# Altium PCB DashDataDisplayPCB.PcbDoc (part 1 of 4)
Units mm, origin at the board's own origin, x right, y up, seen from the top; angles counter-clockwise.
Board outline 152.4 x 101.6 mm, 2 copper layers (Top Layer, Bottom Layer); 143 components, 97 nets, 509 pads, 233 vias.
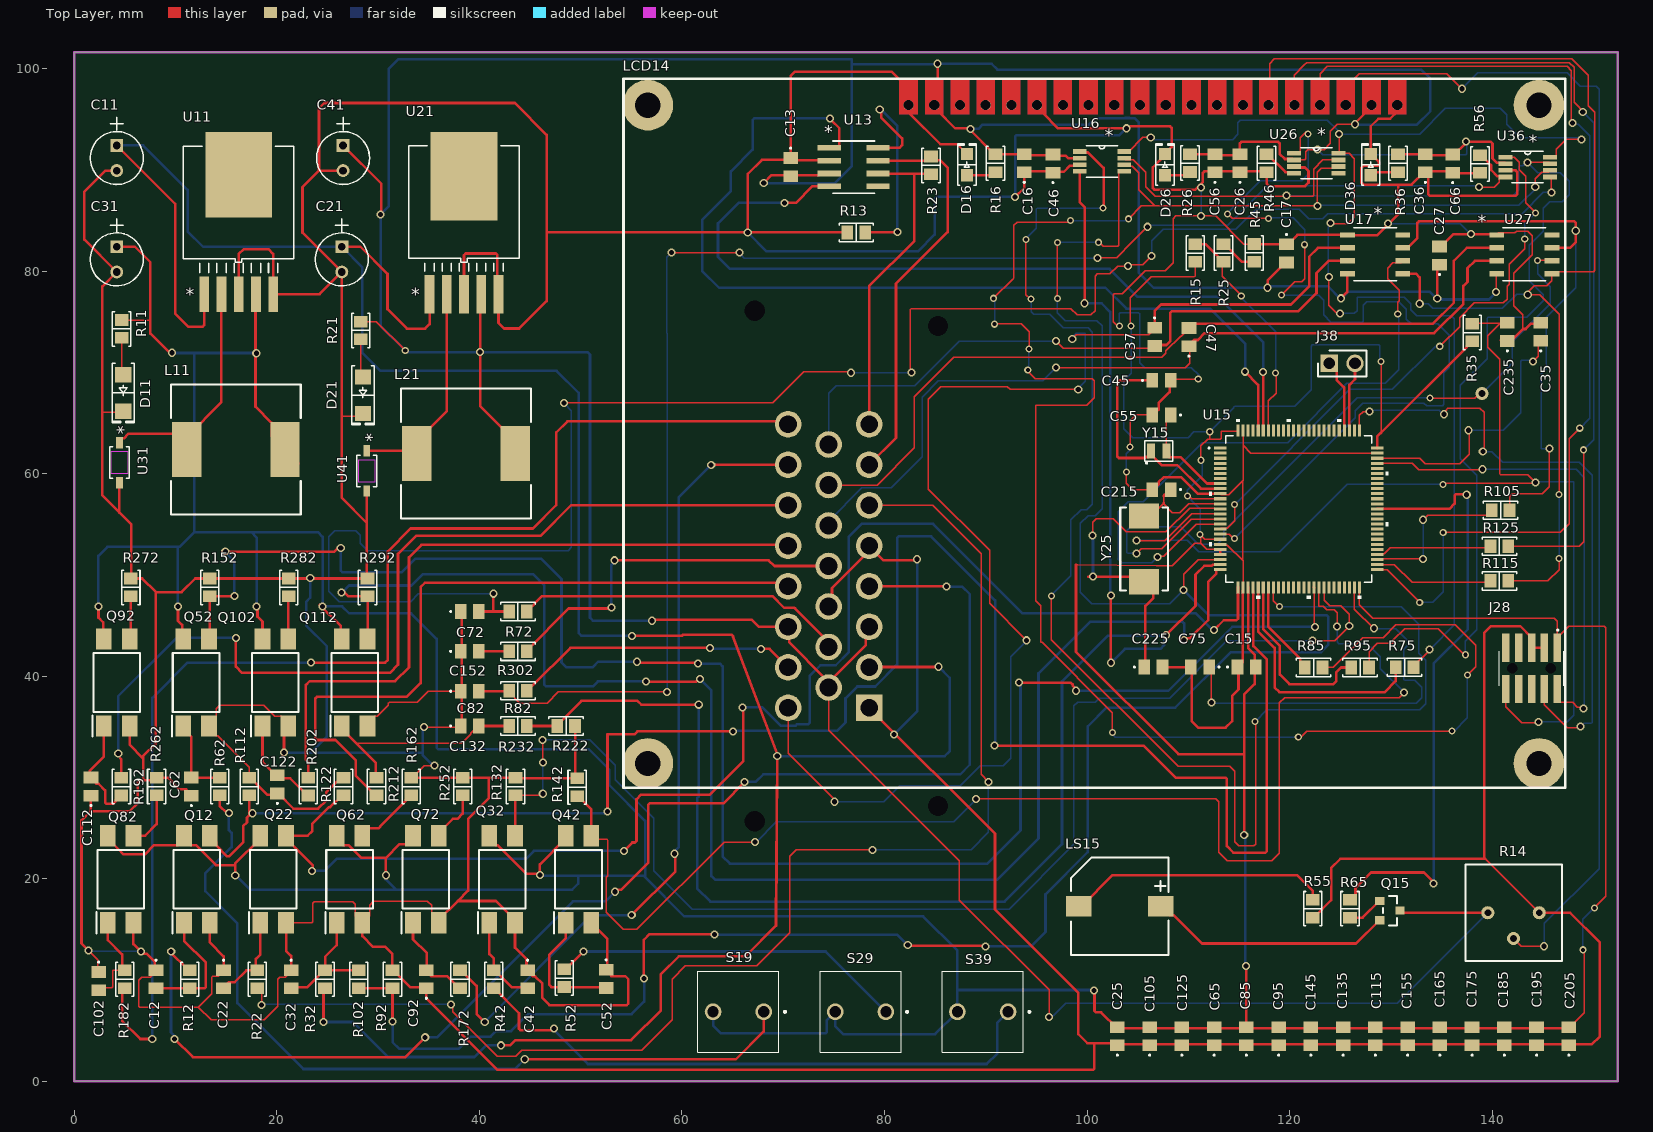
[diagram p0: Top Layer view]
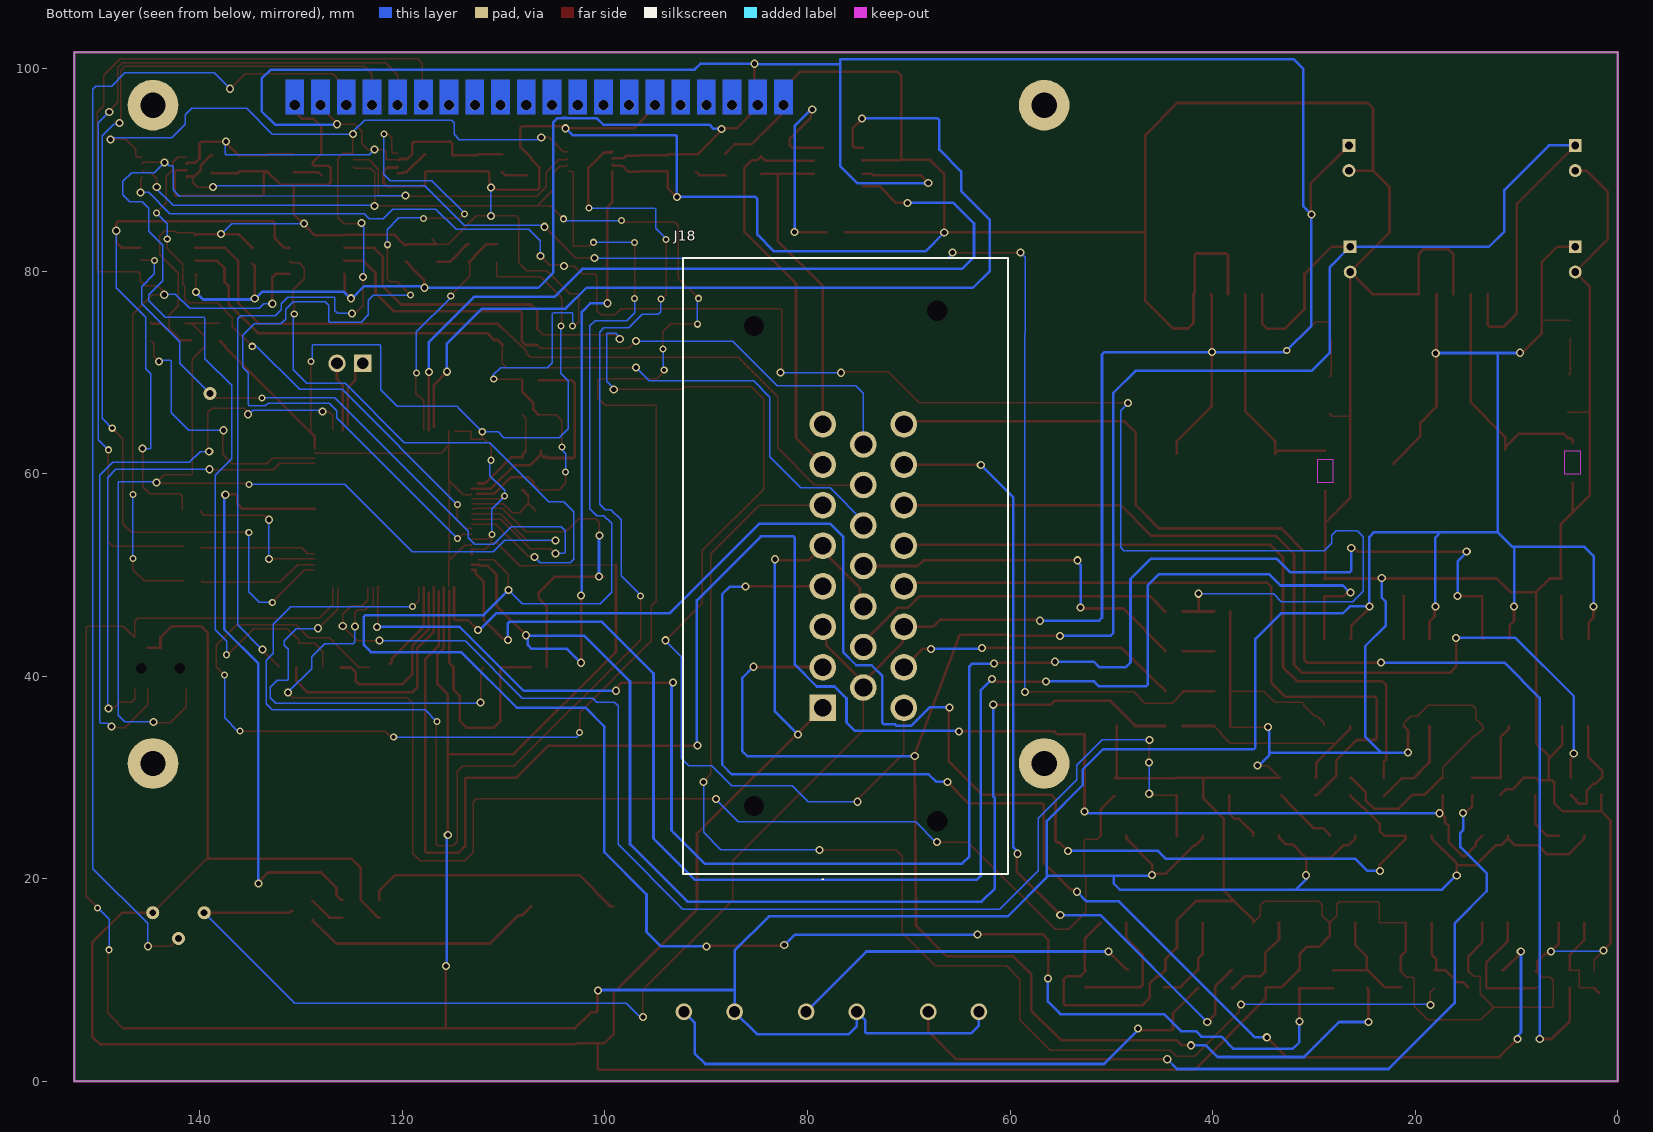
[diagram p1: Bottom Layer view, seen from below]
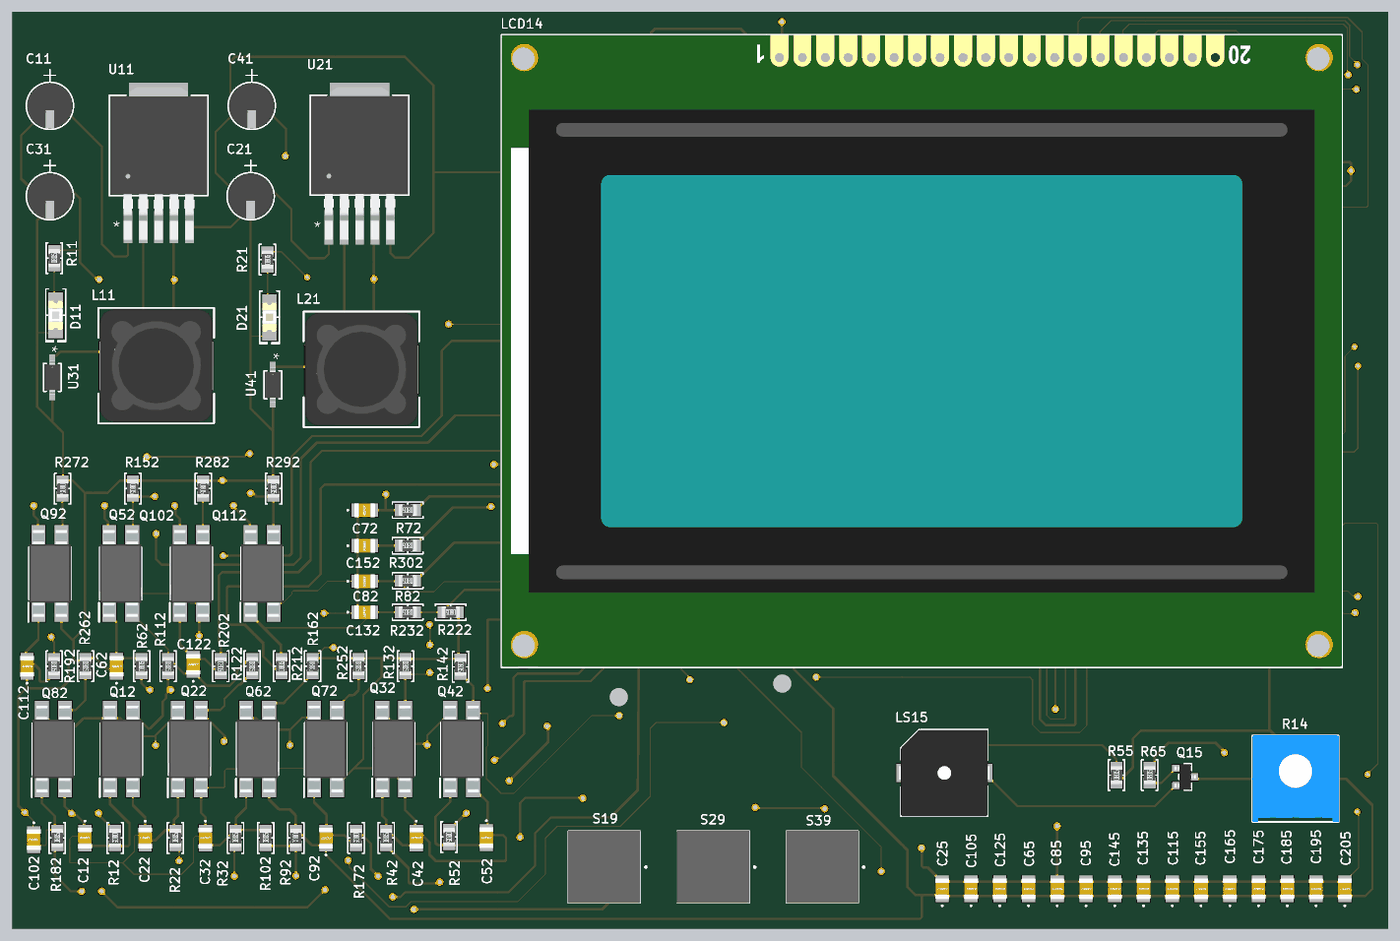
[diagram p4: 3D render of the assembled board from above, using the file's embedded part models]

## Layer stack, top to bottom
Top Solder: solder mask 0.0102, Solder Resist, Dk 3.5
Top Layer: signal copper 0.0356
Dielectric 1: dielectric 0.32, FR-4, Dk 4.8
Bottom Layer: signal copper 0.0356
Bottom Solder: solder mask 0.0102, Solder Resist, Dk 3.5

## Board outline
0,0 152.4,0 152.4,101.6 0,101.6

## Design rules (kind name [scope] priority, off if disabled: settings)
AssemblyTestPointUsage [All] p1: allowmultiple=TRUE
AssemblyTestpoint [All] p1: testpointundercomponent=TRUE minsize=0.3 maxsize=2.54 preferedsize=0.7 minholesize=0 maxholesize=1.016 preferedholesize=0.5 testpointgrid=0.025 usegrid=TRUE gridtolerance=0 allowsidetop=TRUE allowsidebottom=TRUE
BoardOutlineClearance [All] p1: gap=0.4 ignorepadtopadclearanceinfootprint=FALSE
Clearance [All] p1: gap=0.254 ignorepadtopadclearanceinfootprint=TRUE except(0.127: Arc-Arc Arc-Track Track-Track SMDPad-SMDPad SMDPad-THPad THPad-THPad; 0.2: Arc-SMDPad Track-SMDPad; 0.33: Arc-THPad Track-THPad; 0.5: Arc-Hole Track-Hole SMDPad-Hole THPad-Hole Via-Hole Fill-Hole Poly-Hole Region-Hole Text-Hole)
FabricationTestPointUsage [All] p1: valid=0 allowmultiple=TRUE
FabricationTestpoint [All] p1: side=3 testpointundercomponent=TRUE minsize=0.3 maxsize=2.54 preferedsize=0.7 minholesize=0 maxholesize=1.016 preferedholesize=0.5 testpointgrid=0.025 allowsidetop=TRUE allowsidebottom=TRUE usegrid=TRUE gridtolerance=0
Height [All] p1: minheight=0 maxheight=300 prefheight=300
HoleSize [All] p1: absolutevalues=TRUE maxlimit=6.3 minlimit=0.15 maxpercent=80.000 minpercent=20.000
HoleToHoleClearance [All] p1: gap=0.5 allowstackedmicrovias=TRUE
MinimumAnnularRing [All] p1: minimumring=0.14
MinimumSolderMaskSliver [All] p1: minsoldermaskwidth=0.1
PolygonConnect [All] p1: connectstyle=Relief reliefconductorwidth=0.254 reliefentries=4 polygonreliefangle="90 Angle" airgapwidth=0.254
RoutingVias [All] p1: holewidth=0.5 width=0.8 viastyle="Through Hole" minholewidth=0.3 minwidth=0.5 maxholewidth=1.5 maxwidth=1.7
SilkToSilkClearance [All] p1: silktosilkclearance=0.15
SilkToSolderMaskClearance [IsPad] p1: minsilkscreentomaskgap=0.15 clearancetoexposedcopper=TRUE
SolderMaskExpansion [All] p1: expansion=0.1 istentingtop=FALSE
Width [All] p1: maxlimit=0.254 minlimit=0.127 preferedwidth=0.127 minimp=50.000000 maximp=50.000000 favimp=50.000000
20 further rules are at their usual default settings.

## Classes and differential pairs
component class ThermoCoupleCircuit: C17 C27 C37 C47 U17 U27
component class SensorCircuit: C12 C22 C32 C42 C52 C62 C72 C82 C92 C102 C112 C122 C132 C152 Q12 Q22 Q32 Q42 Q52 Q62 Q72 Q82 Q92 Q102 Q112 R12 R22 R32 R42 R52 R62 R72 R82 R92 R102 R112 R122 R132 R142 R152 R162 R172 R182 R192 R202 R212 R222 R232 R252 R262 R272 R282 R292 R302
component class PowerSupply: C11 C21 C31 C41 D11 D21 L11 L21 R11 R21 U11 U21 U31 U41
component class MCUCircuit: C15 C25 C35 C45 C55 C65 C75 C85 C95 C105 C115 C125 C135 C145 C155 C165 C175 C185 C195 C205 C215 C225 C235 LS15 Q15 R15 R25 R35 R45 R55 R65 R75 R85 R95 R105 R115 R125 U15 Y15 Y25
component class LCDCircuit: LCD14 R14
component class Connector: J18 J28 J38
component class CanTrcvCircuit: C13 R13 R23 U13
component class ButtonCircuit: S19 S29 S39
component class ADCCircuit: C16 C26 C36 C46 C56 C66 D16 D26 D36 R16 R26 R36 R46 R56 U16 U26 U36

## Components (designator, comment, footprint, x,y, rotation, side; value= is the part's Value field where it differs from the comment)
C11 "EEUFC0J101" "CAP_5 X 11_PAN" 4.191,92.405 r270 top value=100uF
C12 "0.33µF" C0805 8.069,10.071 r270 top
C13 "0.1 µF" C0805 70.739,90.262 r270 top
C15 "1µF" C0805 115.753,40.894 r0 top
C16 "1 µF" C0805 93.801,90.643 r90 top
C17 "0.1 µF" C0805 119.691,81.739 r270 top
C21 "EEUFC0J101" "CAP_5 X 11_PAN" 26.416,82.398 r270 top value=100uF
C22 "0.33µF" C0805 14.74,10.071 r270 top
C25 "0.1µF" C0805 102.997,4.445 r90 top
C26 "1 µF" C0805 115.101,90.643 r90 top
C27 "0.1 µF" C0805 134.804,81.523 r90 top
C31 "EEUFC0J101" "CAP_5 X 11_PAN" 4.191,82.398 r270 top value=330uF
C32 "0.33µF" C0805 21.412,10.071 r270 top
C35 "2.2 µF" C0805 144.8,74 r90 top
C36 "1 µF" C0805 133.41,90.643 r90 top
C37 "10000 pF" C0805 106.68,73.495 r270 top
C41 "EEUFC0J101" "CAP_5 X 11_PAN" 26.543,92.405 r270 top value=330uF
C42 "0.33µF" C0805 44.763,10.071 r270 top
C45 "12 pF" C0805 107.353,69.215 r0 top
C46 "0.1 µF" C0805 96.632,90.605 r90 top
C47 "10000 pF" C0805 110.06,73.47 r90 top
C52 "0.33µF" C0805 52.52,10.11 r270 top
C55 "12 pF" C0805 107.353,65.786 r180 top
C56 "0.1 µF" C0805 112.633,90.643 r90 top
C62 "0.33µF" C0805 11.557,29.097 r90 top
C65 "1µF" C0805 112.549,4.445 r90 top
C66 "0.1 µF" C0805 136.107,90.605 r90 top
C72 "0.33µF" C0805 39.045,46.382 r0 top
C75 "2.2 µF" C0805 111.153,40.894 r180 top
C82 "0.33µF" C0805 39.045,38.508 r0 top
C85 "0.1µF" C0805 115.733,4.445 r90 top
C92 "0.33µF" C0805 34.756,10.071 r90 top
C95 "1µF" C0805 118.917,4.445 r90 top
C102 "0.33µF" C0805 2.41,9.88 r270 top
C105 "1µF" C0805 106.181,4.445 r90 top
C112 "0.33µF" C0805 1.651,29.097 r90 top
C115 "0.1µF" C0805 128.47,4.445 r90 top
C122 "0.33µF" C0805 20.05,29.31 r90 top
C125 "0.1µF" C0805 109.365,4.445 r90 top
C132 "0.33µF" C0805 39.045,35.079 r0 top
C135 "1µF" C0805 125.285,4.445 r90 top
C145 "0.1µF" C0805 122.101,4.445 r90 top
C152 "0.33µF" C0805 39.045,42.445 r0 top
C155 "1µF" C0805 131.654,4.445 r90 top
C165 "0.1µF" C0805 134.838,4.445 r90 top
C175 "1µF" C0805 138.022,4.445 r90 top
C185 "0.1µF" C0805 141.206,4.445 r90 top
C195 "1µF" C0805 144.39,4.445 r90 top
C205 "0.1µF" C0805 147.574,4.445 r90 top
C215 "12 pF" C0805 107.353,58.42 r180 top
C225 "12 pF" C0805 106.553,40.894 r0 top
C235 "0.1µF" C0805 141.503,73.995 r90 top
D11 "Green" "LED 1206_3216 GREEN" 4.83,67.96 r270 top
D16 "Green" "LED 0805_2012 GREEN" 88.138,90.516 r90 top
D21 "Red" "LED 1206_3216 RED" 28.5,67.74 r270 top
D26 "Green" "LED 0805_2012 GREEN" 107.696,90.516 r90 top
D36 "Green" "LED 0805_2012 GREEN" 128.016,90.516 r90 top
J18 "1-776200-5" 17762005 78.483,36.873 r90 bottom locked
J28 "FTSH-105-01-L-DV-A" FTSH-105-XX-YYY-DV-A 143.891,40.767 r180 top
J38 "87527-2" HDRV2W66P0X254_1X2_467X244X1044P 123.92,70.89 r180 top
L11 "330 µH" "BOURNS SRR1280" 15.96,62.38 r0 top
L21 "330 µH" "BOURNS SRR1280" 38.68,61.98 r0 top
LCD14 "glcd128*64" GLCD128*64 99.859,63.674 r180 top locked
LS15 "SMI-1027-TW-5V-R" "PUI Audio SMI-1027-TW-5V-R" 103.237,17.272 r270 top
Q12 "PC817XNNIP1B" SOP254P960X420-4N 12.107,19.939 r90 top
Q15 "MMBT4124LT1G" "ON SEMI SOT-23-3" 129.903,16.842 r0 top
Q22 "PC817XNNIP1B" SOP254P960X420-4N 19.643,19.939 r90 top
Q32 "PC817XNNIP1B" SOP254P960X420-4N 42.249,19.939 r90 top
Q42 "PC817XNNIP1B" SOP254P960X420-4N 49.784,19.939 r90 top
Q52 "PC817XNNIP1B" SOP254P960X420-4N 12.023,39.37 r90 top
Q62 "PC817XNNIP1B" SOP254P960X420-4N 27.178,19.939 r90 top
Q72 "PC817XNNIP1B" SOP254P960X420-4N 34.713,19.939 r90 top
Q82 "PC817XNNIP1B" SOP254P960X420-4N 4.572,19.939 r90 top
Q92 "PC817XNNIP1B" SOP254P960X420-4N 4.191,39.37 r90 top
Q102 "PC817XNNIP1B" SOP254P960X420-4N 19.854,39.37 r90 top
Q112 "PC817XNNIP1B" SOP254P960X420-4N 27.686,39.37 r90 top
R11 "470 Ohms" "RES 0805_2012" 4.67,74.285 r90 top
R12 "19.1 kOhms" "RES 0805_2012" 11.405,10.071 r270 top
R13 "10 kOhms" "RES 0805_2012" 77.21,83.81 r180 top
R14 "10 kOhms" "BOURNS TRIMPOT 3386P-1" 142.113,16.637 r0 top locked
R15 "10 kOhms" "RES 0805_2012" 110.674,81.777 r270 top
R16 "470 Ohms" "RES 0805_2012" 90.969,90.643 r90 top
R21 "470 Ohms" "RES 0805_2012" 28.28,74.135 r90 top
R22 "19.1 kOhms" "RES 0805_2012" 18.076,10.071 r90 top
R23 "120 Ohms" "RES 0805_2012" 84.59,90.435 r90 top
R25 "510 Ohms" "RES 0805_2012" 113.468,81.777 r90 top
R26 "470 Ohms" "RES 0805_2012" 110.164,90.657 r90 top
R32 "48.7 kOhms" "RES 0805_2012" 24.748,10.071 r90 top
R35 "10 kOhms" "RES 0805_2012" 138.049,73.928 r270 top
R36 "470 Ohms" "RES 0805_2012" 130.713,90.643 r90 top
R42 "19.1 kOhms" "RES 0805_2012" 41.427,10.071 r90 top
R45 "0 Ohms" "RES 0805_2012" 116.516,81.791 r270 top
R46 "10 kOhms" "RES 0805_2012" 117.729,90.643 r90 top
R52 "19.1 kOhms" "RES 0805_2012" 48.387,10.174 r270 top
R55 "100 Ohms" "RES 0805_2012" 122.29,17.035 r90 top
R56 "10 kOhms" "RES 0805_2012" 138.804,90.576 r90 top
R62 "19.1 kOhms" "RES 0805_2012" 14.351,29.097 r90 top
R65 "100 Ohms" "RES 0805_2012" 125.96,17.035 r90 top
R72 "750 Ohms" "RES 0805_2012" 43.807,46.382 r180 top
R75 "0 Ohms" "RES 0805_2012" 131.355,40.89 r180 top
R82 "750 Ohms" "RES 0805_2012" 43.807,38.558 r180 top
R85 "0 Ohms" "RES 0805_2012" 122.374,40.854 r180 top
R92 "1.2 kOhms" "RES 0805_2012" 31.42,10.071 r270 top
R95 "0 Ohms" "RES 0805_2012" 126.974,40.854 r180 top
R102 "10 kOhms" "RES 0805_2012" 28.084,10.071 r90 top
R105 "0 Ohms" "RES 0805_2012" 140.843,56.388 r180 top
R112 "10 kOhms" "RES 0805_2012" 17.272,29.097 r270 top
R115 "0 Ohms" "RES 0805_2012" 140.716,49.403 r180 top
R122 "10 kOhms" "RES 0805_2012" 26.586,29.097 r270 top
R125 "0 Ohms" "RES 0805_2012" 140.716,52.832 r180 top
R132 "10 kOhms" "RES 0805_2012" 43.561,29.097 r270 top
R142 "10 kOhms" "RES 0805_2012" 49.65,29.03 r270 top
R152 "10 kOhms" "RES 0805_2012" 13.377,48.768 r270 top
R162 "10 kOhms" "RES 0805_2012" 33.274,29.097 r270 top
R172 "19.1 kOhms" "RES 0805_2012" 38.092,10.071 r270 top
R182 "19.1 kOhms" "RES 0805_2012" 4.993,10.071 r90 top
R192 "19.1 kOhms" "RES 0805_2012" 4.65,29.09 r270 top
R202 "19.1 kOhms" "RES 0805_2012" 23.11,29.085 r270 top
R212 "48.7 kOhms" "RES 0805_2012" 29.845,29.097 r90 top
R222 "1.2 kOhms" "RES 0805_2012" 48.57,35.079 r180 top
R232 "10 kOhms" "RES 0805_2012" 43.807,35.079 r180 top
R252 "10 kOhms" "RES 0805_2012" 38.354,29.097 r270 top
R262 "10 kOhms" "RES 0805_2012" 8.128,29.097 r270 top
R272 "10 kOhms" "RES 0805_2012" 5.588,48.768 r270 top
R282 "10 kOhms" "RES 0805_2012" 21.167,48.768 r270 top
R292 "10 kOhms" "RES 0805_2012" 28.956,48.768 r270 top
R302 "750 Ohms" "RES 0805_2012" 43.807,42.445 r180 top
S19 "B3WN-6002" B3WN6002 68.072,6.858 r0 top
S29 "B3WN-6002" B3WN6002 80.137,6.858 r0 top
S39 "B3WN-6002" B3WN6002 92.202,6.858 r0 top
U11 "LM2575-3.3BU" TO-263-5_MCL 16.231,86.779 r0 top
U13 "MCP2551T-ISN" SOIC8-N_MC_MCH-M 76.962,90.262 r0 top
U15 "STM32F407VGT6" LQFP100-14x14mm 120.904,56.515 r0 top locked
U16 "ADC122S101CIMMNOPB" MUA08A 101.473,90.826 r0 top
U17 "MAX31855KASA+T" 21-0041B_8_MXM 128.454,81.65 r0 top
U21 "LM2575-5.0BU" TO-263-5_MCL-M 38.481,86.804 r0 top
U26 "ADC122S101CIMMNOPB" MUA08A 122.645,90.643 r0 top
U27 "MAX31855KASA+T" 21-0041B_8_MXM 143.186,81.65 r0 top locked
U31 "1N5819HW-7-F" 1N5819HW-7-F_DIO 4.46,61.08 r270 top
U36 "ADC122S101CIMMNOPB" MUA08A 143.51,90.262 r0 top
U41 "1N5819HW-7-F" 1N5819HW-7-F_DIO 28.877,60.264 r270 top
Y15 "32.768 kHz" "MICRO CRYSTAL CM8V H0.6mm" 107.078,62.23 r0 top
Y25 "8MHz" "NDK NX8045GB" 105.63,52.57 r270 top

## Footprints (in the part's own frame and the unit in brackets; to place one, negate y for a bottom-side part, rotate by r counter-clockwise, add the part's x,y. Pads: shape width x height; smd on the part's side, far side on the other; paste and mask are expansions set on the pad)
1N5819HW-7-F_DIO [mil]
  rect 44x26 smd paste+0 mask+0: 1(-77.79,0) 2(77.79,0)
  Keep-Out Layer region: -43.79,-31.5 -43.79,31.5 43.79,31.5 43.79,-31.5
  silkscreen extent -61,-39 61,39, body extent -76,-34 76,34, height 53
21-0041B_8_MXM [mil]
  rect 57.5x21 smd paste+0 mask+0: 1(-107.25,75) 2(-107.25,25) 3(-107.25,-25) 4(-107.25,-75) 5(107.25,-75) 6(107.25,-25) 7(107.25,25) 8(107.25,75)
  silkscreen extent -84,-104 84,104, body extent -122,-99 122,99, height 69
17762005 [mm]
  rect 2.625x2.625 hole 1.75: 1(0,0)
  round 2.625 hole 1.75: 2(4,0) 3(8,0) 4(12,0) 5(16,0) 6(20,0) 7(24,0) 8(28,0) 9(2,-4) 10(6,-4) 11(10,-4) 12(14,-4) 13(18,-4) 14(22,-4) 15(26,-4) 16(0,-8) 17(4,-8) 18(8,-8) 19(12,-8) 20(16,-8) 21(20,-8) 22(24,-8) 23(28,-8)
  round 1 hole 2 unplated: MH1(-9.7,6.8) MH2(37.7,6.8) MH3(-11.2,-11.3) MH4(39.2,-11.3)
  silkscreen extent -17,-18.3 44.4,13.8, body extent -16.4,-19.92 44.4,12.18, height 35
B3WN6002 [mm]
  round 1.65 hole 1.1: 1(0,0) 2(-5,0)
  silkscreen extent -6.5,-4 2.2,4, body extent -6.5,-4 1.5,4, height 13.3
"BOURNS SRR1280" [mm] "Precision Wire Wound Inductor, 2-Leads, Body 12.50x12.50mm, IPC Medium Density"
  rect 2.9x5.4 smd: 1(-4.85,0) 2(4.85,0)
  silkscreen extent -6.4,-6.4 6.4,6.4, body extent -6.25,-6.25 6.25,6.25, height 7.9
"BOURNS TRIMPOT 3386P-1" [mm] "3386 - 3/8 ? Square Trimpot� Trimming Potentiometer"
  round 1.29 hole 0.69: 1(-2.54,0) 2(0,-2.54) 3(2.54,0)
  silkscreen extent -4.76,-4.76 4.76,4.76, body extent -4.79,-4.79 4.79,4.79, height 4.95
C0805 [mm]
  rect 1.15x1.45 smd: 1(-0.9,0) 2(0.9,0)
  silkscreen extent -1.93,-0.05 -1.83,0.05, body extent -1.15,-0.78 1.15,0.77, height 0.98
"CAP_5 X 11_PAN" [mil]
  rect 50x50 / inner round 60 / far side rect 50x50 hole 30 paste-99999 mask+0: 1(0,0)
  round 50 / inner round 60 / far side round 50 hole 30 paste-99999 mask+0: 2(98,0)
  silkscreen extent -109,-103 152,103, body extent -49,-98 148,98, height 434
FTSH-105-XX-YYY-DV-A [mm]
  rect 0.74x2.79 smd: 1(-2.54,-2.035) 2(-2.54,2.035) 3(-1.27,-2.035) 4(-1.27,2.035) 5(0,-2.035) 6(0,2.035) 7(1.27,-2.035) 8(1.27,2.035) 9(2.54,-2.035) 10(2.54,2.035)
  round 0.51 hole 1.02 unplated: 11(-1.905,0) 12(1.905,0)
  silkscreen extent -3.18,-3.83 3.18,1.72
GLCD128*64 [mm]
  round 1 hole 1: 1(-30.771,-32.706) 2(-28.231,-32.706) 3(-25.691,-32.706) 4(-23.151,-32.706) 5(-20.611,-32.706) 6(-18.071,-32.706) 7(-15.531,-32.706) 8(-12.991,-32.706) 9(-10.451,-32.706) 10(-7.911,-32.706) 11(-5.371,-32.706) 12(-2.831,-32.706) 13(-0.291,-32.706) 14(2.249,-32.706) 15(4.789,-32.706) 16(7.329,-32.706) 17(9.869,-32.706) 18(12.409,-32.706) 19(14.949,-32.706) 20(17.489,-32.706)
  round 5 hole 2.5: 21(-44.771,-32.706) 22(43.229,-32.706) 23(-44.771,32.294) 24(43.229,32.294)
  Top Layer region: -31.671,-31.806 -31.671,-31.806 -29.871,-31.806 -29.871,-35.206 -31.671,-35.206
  Top Layer region: 16.589,-31.806 16.589,-31.806 18.389,-31.806 18.389,-35.206 16.589,-35.206
  Top Layer region: 14.049,-31.806 14.049,-31.806 15.849,-31.806 15.849,-35.206 14.049,-35.206
  Top Layer region: 11.509,-31.806 11.509,-31.806 13.309,-31.806 13.309,-35.206 11.509,-35.206
  Top Layer region: 8.969,-31.806 8.969,-31.806 10.769,-31.806 10.769,-35.206 8.969,-35.206
  Top Layer region: 6.429,-31.806 6.429,-31.806 8.229,-31.806 8.229,-35.206 6.429,-35.206
  Top Layer region: 3.889,-31.806 3.889,-31.806 5.689,-31.806 5.689,-35.206 3.889,-35.206
  Top Layer region: 1.349,-31.806 1.349,-31.806 3.149,-31.806 3.149,-35.206 1.349,-35.206
  Top Layer region: -1.191,-31.806 -1.191,-31.806 0.609,-31.806 0.609,-35.206 -1.191,-35.206
  Top Layer region: -3.731,-31.806 -3.731,-31.806 -1.931,-31.806 -1.931,-35.206 -3.731,-35.206
  Top Layer region: -6.271,-31.806 -6.271,-31.806 -4.471,-31.806 -4.471,-35.206 -6.271,-35.206
  Top Layer region: -8.811,-31.806 -8.811,-31.806 -7.011,-31.806 -7.011,-35.206 -8.811,-35.206
  Top Layer region: -11.351,-31.806 -11.351,-31.806 -9.551,-31.806 -9.551,-35.206 -11.351,-35.206
  Top Layer region: -13.891,-31.806 -13.891,-31.806 -12.091,-31.806 -12.091,-35.206 -13.891,-35.206
  Top Layer region: -16.431,-31.806 -16.431,-31.806 -14.631,-31.806 -14.631,-35.206 -16.431,-35.206
  Top Layer region: -18.971,-31.806 -18.971,-31.806 -17.171,-31.806 -17.171,-35.206 -18.971,-35.206
  Top Layer region: -21.511,-31.806 -21.511,-31.806 -19.711,-31.806 -19.711,-35.206 -21.511,-35.206
  Top Layer region: -24.051,-31.806 -24.051,-31.806 -22.251,-31.806 -22.251,-35.206 -24.051,-35.206
  Top Layer region: -26.591,-31.806 -26.591,-31.806 -24.791,-31.806 -24.791,-35.206 -26.591,-35.206
  Top Layer region: -29.131,-31.806 -29.131,-31.806 -27.331,-31.806 -27.331,-35.206 -29.131,-35.206
  Bottom Layer region: 16.589,-31.806 16.589,-31.806 18.389,-31.806 18.389,-35.206 16.589,-35.206
  Bottom Layer region: 14.049,-31.806 14.049,-31.806 15.849,-31.806 15.849,-35.206 14.049,-35.206
  Bottom Layer region: 11.509,-31.806 11.509,-31.806 13.309,-31.806 13.309,-35.206 11.509,-35.206
  Bottom Layer region: 8.969,-31.806 8.969,-31.806 10.769,-31.806 10.769,-35.206 8.969,-35.206
  Bottom Layer region: 6.429,-31.806 6.429,-31.806 8.229,-31.806 8.229,-35.206 6.429,-35.206
  Bottom Layer region: 3.889,-31.806 3.889,-31.806 5.689,-31.806 5.689,-35.206 3.889,-35.206
  Bottom Layer region: 1.349,-31.806 1.349,-31.806 3.149,-31.806 3.149,-35.206 1.349,-35.206
  Bottom Layer region: -1.191,-31.806 -1.191,-31.806 0.609,-31.806 0.609,-35.206 -1.191,-35.206
  Bottom Layer region: -3.731,-31.806 -3.731,-31.806 -1.931,-31.806 -1.931,-35.206 -3.731,-35.206
  Bottom Layer region: -6.271,-31.806 -6.271,-31.806 -4.471,-31.806 -4.471,-35.206 -6.271,-35.206
  Bottom Layer region: -8.811,-31.806 -8.811,-31.806 -7.011,-31.806 -7.011,-35.206 -8.811,-35.206
  Bottom Layer region: -11.351,-31.806 -11.351,-31.806 -9.551,-31.806 -9.551,-35.206 -11.351,-35.206
  Bottom Layer region: -13.891,-31.806 -13.891,-31.806 -12.091,-31.806 -12.091,-35.206 -13.891,-35.206
  Bottom Layer region: -16.431,-31.806 -16.431,-31.806 -14.631,-31.806 -14.631,-35.206 -16.431,-35.206
  Bottom Layer region: -18.971,-31.806 -18.971,-31.806 -17.171,-31.806 -17.171,-35.206 -18.971,-35.206
  Bottom Layer region: -21.511,-31.806 -21.511,-31.806 -19.711,-31.806 -19.711,-35.206 -21.511,-35.206
  Bottom Layer region: -24.051,-31.806 -24.051,-31.806 -22.251,-31.806 -22.251,-35.206 -24.051,-35.206
  Bottom Layer region: -26.591,-31.806 -26.591,-31.806 -24.791,-31.806 -24.791,-35.206 -26.591,-35.206
  Bottom Layer region: -29.131,-31.806 -29.131,-31.806 -27.331,-31.806 -27.331,-35.206 -29.131,-35.206
  Bottom Layer region: -31.671,-31.806 -31.671,-31.806 -29.871,-31.806 -29.871,-35.206 -31.671,-35.206
  silkscreen extent -47.37,-35.31 45.63,34.69, body extent -47.37,-35.33 45.63,34.67, height 29.6
HDRV2W66P0X254_1X2_467X244X1044P [mm]
  rect 1.725x1.725 hole 1.15: 1(0,0)
  round 1.725 hole 1.15: 2(-2.54,0)
  silkscreen extent -3.67,-1.28 1.13,1.28, body extent -3.61,-1.17 1.07,1.17, height 10.83
"LED 0805_2012 GREEN" [mm] "Chip Diode, 2-Leads, Body 2.00x1.25mm, IPC Medium Density"
  rect 1.2x1.2 smd: 1(-1.05,0) 2(1.05,0)
  silkscreen extent -2.03,-0.9 2.03,0.9, body extent -1,-0.62 1,0.63, height 0.9
"LED 1206_3216 GREEN" [mm] "Chip Diode, 2-Leads, Body 3.13x1.55mm, IPC Medium Density"
  rect 1.5x1.6 smd: 1(-1.8,0) 2(1.8,0)
  silkscreen extent -2.92,-1.1 2.92,1.1, body extent -1.6,-0.8 1.6,0.8, height 0.9
"LED 1206_3216 RED" [mm] "Chip Diode, 2-Leads, Body 3.13x1.55mm, IPC Medium Density"
  rect 1.5x1.6 smd: 1(-1.8,0) 2(1.8,0)
  silkscreen extent -2.92,-1.1 2.92,1.1, body extent -1.6,-0.8 1.6,0.8, height 0.9
LQFP100-14x14mm [mil]
  rect 47x12 smd paste+0 mask+0: 1(-305.12,236.22) 2(-305.12,216.54) 3(-305.12,196.85) 4(-305.12,177.17) 5(-305.12,157.48) 6(-305.12,137.8) 7(-305.12,118.11) 8(-305.12,98.43) 9(-305.12,78.74) 10(-305.12,59.06) 11(-305.12,39.37) 12(-305.12,19.69) 13(-305.12,0) 14(-305.12,-19.68) 15(-305.12,-39.37) 16(-305.12,-59.06) 17(-305.12,-78.74) 18(-305.12,-98.43) 19(-305.12,-118.11) 20(-305.12,-137.8) 21(-305.12,-157.48) 22(-305.12,-177.17) 23(-305.12,-196.85) 24(-305.12,-216.54) 25(-305.12,-236.22) 51(305.12,-236.22) 52(305.12,-216.54) 53(305.12,-196.85) 54(305.12,-177.17) 55(305.12,-157.48) 56(305.12,-137.8) 57(305.12,-118.11) 58(305.12,-98.43) 59(305.12,-78.74) 60(305.12,-59.06) 61(305.12,-39.37) 62(305.12,-19.68) 63(305.12,0) 64(305.12,19.68) 65(305.12,39.37) 66(305.12,59.06) 67(305.12,78.74) 68(305.12,98.43) 69(305.12,118.11) 70(305.12,137.8) 71(305.12,157.48) 72(305.12,177.17) 73(305.12,196.85) 74(305.12,216.54) 75(305.12,236.22)
  rect 12x47 smd paste+0 mask+0: 26(-236.22,-305.12) 27(-216.54,-305.12) 28(-196.85,-305.12) 29(-177.17,-305.12) 30(-157.48,-305.12) 31(-137.8,-305.12) 32(-118.11,-305.12) 33(-98.43,-305.12) 34(-78.74,-305.12) 35(-59.06,-305.12) 36(-39.37,-305.12) 37(-19.69,-305.12) 38(0,-305.12) 39(19.69,-305.12) 40(39.37,-305.12) 41(59.06,-305.12) 42(78.74,-305.12) 43(98.43,-305.12) 44(118.11,-305.12) 45(137.8,-305.12) 46(157.48,-305.12) 47(177.17,-305.12) 48(196.85,-305.12) 49(216.54,-305.12) 50(236.22,-305.12) 76(236.22,305.12) 77(216.54,305.12) 78(196.85,305.12) 79(177.17,305.12) 80(157.48,305.12) 81(137.8,305.12) 82(118.11,305.12) 83(98.43,305.12) 84(78.74,305.12) 85(59.06,305.12) 86(39.37,305.12) 87(19.69,305.12) 88(0,305.12) 89(-19.69,305.12) 90(-39.37,305.12) 91(-59.06,305.12) 92(-78.74,305.12) 93(-98.43,305.12) 94(-118.11,305.12) 95(-137.8,305.12) 96(-157.48,305.12) 97(-177.17,305.12) 98(-196.85,305.12) 99(-216.54,305.12) 100(-236.22,305.12)
  silkscreen extent -351,-349 349,349, body extent -315,-315 315,315, height 63
"MICRO CRYSTAL CM8V H0.6mm" [mm] "SMD Crystal 2.0 x 1.2 x 0.6mm"
  rect 0.8x1.5 smd: 1(-0.75,0) 2(0.75,0)
  silkscreen extent -1.4,-1.25 1.4,1, body extent -1,-0.6 1,0.6, height 0.6
MUA08A [mil]
  rect 54x18 smd paste-27 mask+4: 1(-86.5,38.39) 2(-86.5,12.8) 3(-86.5,-12.8) 4(-86.5,-38.39) 5(86.5,-38.39) 6(86.5,-12.8) 7(86.5,12.8) 8(86.5,38.39)
  silkscreen extent -61,-61 61,61, body extent -61,-61 61,61, height 43
"NDK NX8045GB" [mm] "Crystal, 2-Leads, Body 4.50x8.00mm, Pitch 6.50mm, IPC Medium Density"
  rect 2.5x3 smd: 1(-3.25,0) 2(3.25,0)
  silkscreen extent -4.1,-2.35 4.1,2.35, body extent -4,-2.25 4,2.25, height 1.8
"ON SEMI SOT-23-3" [mm] "SOT23, 3-Leads, Body 2.90x2.40mm, Pitch 0.95mm, IPC Medium Density"
  rect 0.9x0.8 smd: 1(-1,0.95) 2(-1,-0.95) 3(1,0)
  silkscreen extent -0.7,-1.45 0.7,1.45, body extent -1.16,-1.45 1.16,1.45, height 1
"PUI Audio SMI-1027-TW-5V-R" [mm] "Buzzer 9.6x9.6mm"
  rect 2x2.5 smd: +(0,4.05) -(0,-4.05)
  silkscreen extent -4.8,-4.8 4.8,4.8, body extent -4.8,-5 4.8,5, height 5
"RES 0805_2012" [mm] "Chip Resistor, 2-Leads, Body 2.00x1.25mm, IPC Medium Density"
  rect 1.15x1.35 smd: 1(-0.875,0) 2(0.875,0)
  silkscreen extent -1.7,-0.9 1.7,0.9, body extent -1,-0.62 1,0.63, height 0.6
SOIC8-N_MC_MCH-M [mil]
  rect 90x22 smd paste+0 mask+0: 1(-95,75) 2(-95,25) 3(-95,-25) 4(-95,-75) 5(95,-75) 6(95,-25) 7(95,25) 8(95,75)
  silkscreen extent -82,-102 82,102, body extent -118,-96 118,96, height 69
SOP254P960X420-4N [mm]
  rect 2.1x1.55 smd: 1(-4.3,1.27) 2(-4.3,-1.27) 3(4.3,-1.27) 4(4.3,1.27)
  silkscreen extent -5.35,-2.3 2.9,2.39, body extent -4.8,-2.3 4.8,2.3, height 4.2
TO-263-5_MCL [mil]
  rect 38x138 smd paste+0 mask+0: 1(-134,-356.5) 2(-67,-356.5) 3(0,-356.5) 4(67,-356.5) 5(134,-356.5)
  rect 258x333 smd paste+0 mask+0: 6(0,108)
  silkscreen extent -215,-274 215,218, body extent -210,-411 210,254, height 181
TO-263-5_MCL-M [mil]
  rect 38x150 smd paste+0 mask+0: 1(-134,-358.5) 2(-67,-358.5) 3(0,-358.5) 4(67,-358.5) 5(134,-358.5)
  rect 260x345 smd paste+0 mask+0: 6(0,101)
  silkscreen extent -215,-270 215,218, body extent -210,-411 210,254, height 181

## Part data
C11 C21 C31 C41: "No Description Available", Mfr_Name=Panasonic
C12 C22 C32 C42 C52 C62 C72 C82 C92 C102 C112 C122 C132 C152: library part 0805YC334JAT2A, "CAP CER 0.33UF 16V X7R 0805", Device Package="0805 (2012 Metric)", manufacturer="AVX Corporation", Operating Temperature="-55°C ~ 125°C", Supplier Part Number 1=478-5273-1-ND, Temperature Coefficient=X7R, Tolerance=±5%, Voltage - Rated=16V, Applications="General Purpose", Capacitance=0.33µF, componentlink1description=Datasheet, componentlink1url=http://datasheets.avx.com/X7RDielectric.pdf, componentlink2description="DigiKey Link", componentlink2url=http://digikey.com/product-detail/en/avx-corporation/0805YC334JAT2A/478-5273-1-ND/1950940, lastupdated="9/2/2020 01:04:40", Lifecycle Status=Active, Minimum Order=1, Mounting Type="Surface Mount, MLCC", Package / Case="0805 (2012 Metric)", packaging=TapeAndReel, Part Number=0805YC334JAT2A, Part Status=Active, partid=3309, price=0.15, series=-, Size / Dimension="0.079\" L x 0.049\" W (2.01mm x 1.25mm)", Supplier 1=DigiKey, Thickness (Max)="0.055\" (1.40mm)"
C13 C17 C27 C46 C56 C66: library part 0805B104K160CT, "CAP CER 0.1UF 16V X7R 0805", Device Package="0805 (2012 Metric)", manufacturer="Walsin Technology Corporation", Operating Temperature="-55°C ~ 125°C", Supplier Part Number 1=1292-1565-1-ND, Temperature Coefficient=X7R, Tolerance=±10%, Voltage - Rated=16V, Applications="General Purpose", Capacitance="0.1 µF", componentlink1description=Datasheet, componentlink1url=http://www.passivecomponent.com/wp-content/uploads/2018/10/MLCC.pdf, componentlink2description="DigiKey Link", componentlink2url=https://www.digikey.com/en/products/detail/walsin-technology-corporation/0805B104K160CT/9355062, lastupdated="2/9/2024 20:16:02", Lifecycle Status=Active, Minimum Order=1, Mounting Type="Surface Mount, MLCC", Package / Case="0805 (2012 Metric)", packaging=TapeAndReel, Part Number=0805B104K160CT, Part Status=Active, partid=4882, price=0.01, series=-, Size / Dimension="0.079\" L x 0.049\" W (2.00mm x 1.25mm)", Supplier 1=DigiKey, Thickness (Max)="0.035\" (0.90mm)"
C15 C65 C95 C105 C135 C155 C175 C195: library part LGC26D105MAT2S1, "CAP CER 1UF 6.3V X5R 0805", Device Package="0805 (2012 Metric)", manufacturer="AVX Corporation", Operating Temperature="-55°C ~ 85°C", Supplier Part Number 1=478-6694-1-ND, Temperature Coefficient=X5R, Tolerance=±20%, Voltage - Rated=6.3V, Applications="Bypass, Decoupling", Capacitance=1µF, componentlink1description=Datasheet, componentlink1url=http://datasheets.avx.com/LGA.pdf, componentlink2description="DigiKey Link", componentlink2url=http://digikey.com/product-detail/en/avx-corporation/LGC26D105MAT2S1/478-6694-1-ND/2694148, Features="Low ESL (Multi-Terminal)", lastupdated="9/2/2020 01:04:42", Lifecycle Status=Active, Minimum Order=1, Mounting Type="Surface Mount, MLCC", Package / Case="0805 (2012 Metric)", packaging=TapeAndReel, Part Number=LGC26D105MAT2S1, Part Status=Active, partid=2463, price=0.63, series="LGC2 (LGA)", Size / Dimension="0.081\" L x 0.052\" W (2.06mm x 1.32mm)", Supplier 1=DigiKey, Thickness (Max)="0.022\" (0.55mm)"
C16 C26 C36: library part EMK212B7105KGHTR, "CAP CER 1UF 16V X7R 0805", Device Package="0805 (2012 Metric)", manufacturer="Taiyo Yuden", Operating Temperature="-55°C ~ 125°C", Ratings=AEC-Q200, Supplier Part Number 1=587-6310-1-ND, Temperature Coefficient=X7R, Tolerance=±10%, Voltage - Rated=16V, Applications=Automotive, Capacitance="1 µF", componentlink1description=Datasheet, componentlink1url="https://ds.yuden.co.jp/TYCOMPAS/ut/detail?pn=EMK212B7105KGHTR &u=M", componentlink2description="DigiKey Link", componentlink2url=https://www.digikey.com/en/products/detail/taiyo-yuden/EMK212B7105KGHTR/6563155, lastupdated="2/9/2024 20:16:06", Lifecycle Status=Active, Minimum Order=1, Mounting Type="Surface Mount, MLCC", Package / Case="0805 (2012 Metric)", packaging=TapeAndReel, Part Number=EMK212B7105KGHTR, Part Status=Active, partid=3641, price=0.03, series=M, Size / Dimension="0.079\" L x 0.049\" W (2.00mm x 1.25mm)", Supplier 1=DigiKey, Thickness (Max)="0.053\" (1.35mm)"
C25 C85 C115 C125 C145 C165 C185 C205 C235: library part 08056C104JAZ2A, "CAP CER 0.1UF 6.3V X7R 0805", Device Package="0805 (2012 Metric)", manufacturer="AVX Corporation", Operating Temperature="-55°C ~ 125°C", Supplier Part Number 1=478-11914-1-ND, Temperature Coefficient=X7R, Tolerance=±5%, Voltage - Rated=6.3V, Applications="Boardflex Sensitive", Capacitance=0.1µF, componentlink1description=Datasheet, componentlink1url=http://datasheets.avx.com/FlexitermMLCC.pdf, componentlink2description="DigiKey Link", componentlink2url=http://digikey.com/product-detail/en/avx-corporation/08056C104JAZ2A/478-11914-1-ND/8573550, Features="Soft Termination", lastupdated="9/2/2020 01:04:11", Lifecycle Status=Active, Minimum Order=1, Mounting Type="Surface Mount, MLCC", Package / Case="0805 (2012 Metric)", packaging=TapeAndReel, Part Number=08056C104JAZ2A, Part Status=Active, partid=16783, price=0.08, series=FLEXITERM®, Size / Dimension="0.079\" L x 0.049\" W (2.01mm x 1.25mm)", Supplier 1=DigiKey
C35 C75: library part VJ0805G225KXYTW1BC, "CAP CER 2.2UF 6.3V X5R 0805", Device Package="0805 (2012 Metric)", manufacturer="Vishay Vitramon", Operating Temperature="-55°C ~ 85°C", Supplier Part Number 1=720-1727-1-ND, Temperature Coefficient=X5R, Tolerance=±10%, Voltage - Rated=6.3V, Applications="General Purpose", Capacitance="2.2 µF", componentlink1description=Datasheet, componentlink1url=https://www.vishay.com/docs/28548/vjw1bcbascomseries.pdf, componentlink2description="DigiKey Link", componentlink2url=https://www.digikey.com/en/products/detail/vishay-vitramon/VJ0805G225KXYTW1BC/8310442, lastupdated="2/9/2024 20:16:05", Lifecycle Status=Active, Minimum Order=1, Mounting Type="Surface Mount, MLCC", Package / Case="0805 (2012 Metric)", packaging=TapeAndReel, Part Number=VJ0805G225KXYTW1BC, Part Status=Active, partid=3978, price=0.08, series="VJ W1BC", Size / Dimension="0.079\" L x 0.049\" W (2.00mm x 1.25mm)", Supplier 1=DigiKey, Thickness (Max)="0.057\" (1.45mm)"
C37 C47: library part C0805C103K4REC7800, "CAP CER 0805 10NF 16V X7R 10%", Device Package="0805 (2012 Metric)", manufacturer=KEMET, Operating Temperature="-55°C ~ 125°C", Supplier Part Number 1=399-C0805C103K4REC7800CT-ND, Temperature Coefficient=X7R, Tolerance=±10%, Voltage - Rated=16V, Applications="ESD Protection", Capacitance="10000 pF", componentlink1description=Datasheet, componentlink1url=https://connect.kemet.com:7667/gateway/IntelliData-ComponentDocumentation/1.0/download/datasheet/C0805C103K4REC7800, componentlink2description="DigiKey Link", componentlink2url=https://www.digikey.com/en/products/detail/kemet/C0805C103K4REC7800/8643796, lastupdated="2/9/2024 20:14:57", Lifecycle Status=Active, Minimum Order=1, Mounting Type="Surface Mount, MLCC", Package / Case="0805 (2012 Metric)", packaging=TapeAndReel, Part Number=C0805C103K4REC7800, Part Status=Active, partid=46019, price=0.03, series="ESD SMD Comm X7R", Size / Dimension="0.079\" L x 0.049\" W (2.00mm x 1.25mm)", Supplier 1=DigiKey, Thickness (Max)="0.035\" (0.88mm)"
C45 C55 C215 C225: library part C0805C120J8HAC7800, "CAP CER 12PF 10V X8R 0805", Device Package="0805 (2012 Metric)", manufacturer=KEMET, Operating Temperature="-55°C ~ 150°C", Supplier Part Number 1=399-C0805C120J8HAC7800CT-ND, Temperature Coefficient=X8R, Tolerance=±5%, Voltage - Rated=10V, Applications="General Purpose", Capacitance="12 pF", componentlink1description=Datasheet, componentlink1url=https://api.kemet.com/component-edge/download/datasheet/C0805C120J8HAC7800.pdf, componentlink2description="DigiKey Link", componentlink2url=https://www.digikey.com/en/products/detail/kemet/C0805C120J8HAC7800/7948305, Features="Low ESL, High Temperature", lastupdated="2/9/2024 20:15:06", Lifecycle Status=Active, Minimum Order=1, Mounting Type="Surface Mount, MLCC", Package / Case="0805 (2012 Metric)", packaging=TapeAndReel, Part Number=C0805C120J8HAC7800, Part Status=Active, partid=32071, price=0.01, series="SMD Comm X8R HT150C", Size / Dimension="0.079\" L x 0.049\" W (2.00mm x 1.25mm)", Supplier 1=DigiKey, Thickness (Max)="0.035\" (0.88mm)"
D11: library part 597-6322-107F, "LED GREEN 1206 SMD", Current - Test=20mA, Device Package="1206 (3216 Metric)", manufacturer=Dialight, Millicandela Rating=1278.5mcd, Supplier Device Package=1206, Supplier Part Number 1=350-597-6322-107FCT-ND, Voltage - Forward (Vf) (Typ)=3.2V, Color=Green, componentlink1description=Datasheet, componentlink1url=https://s3-us-west-2.amazonaws.com/catsy.557/C18571.pdf, componentlink2description="DigiKey Link", componentlink2url=https://www.digikey.com/en/products/detail/dialight/597-6322-107F/16995758, Height (Max)=1.73mm, lastupdated="6/3/2024 19:59:09", Lens Size="1.20mm Dia", Lens Style="Round with Domed Top", Lifecycle Status=Active, Minimum Order=1, Mounting Type="Surface Mount", Package / Case="1206 (3216 Metric)", packaging=TapeAndReel, Part Number=597-6322-107F, Part Status=Active, partid=1292, price=0.17, series=-, Size / Dimension="3.20mm L x 1.60mm W", Supplier 1=DigiKey, Viewing Angle=30°, Wavelength - Dominant=525nm
D16 D26 D36: library part SM0805UGC, "LED GREEN CLEAR 0805 SMD", Current - Test=20mA, Device Package="0805 (2012 Metric)", Lens Color=Colorless, manufacturer="Bivar Inc.", Millicandela Rating=10mcd, Supplier Device Package=0805, Supplier Part Number 1=492-1329-1-ND, Voltage - Forward (Vf) (Typ)=2V, Color=Green, componentlink1description=Datasheet, componentlink1url=https://www.bivar.com/Files/Datasheets/SM0805UGC.pdf, componentlink2description="DigiKey Link", componentlink2url=https://www.digikey.com/en/products/detail/bivar-inc/SM0805UGC/2408549, Configuration=Standard, Height (Max)=1.10mm, lastupdated="3/11/2024 07:52:46", Lens Size="1.40mm x 1.20mm", Lens Style="Rectangle with Flat Top", Lens Transparency=Clear, Lifecycle Status=Active, Minimum Order=1, Mounting Type="Surface Mount", Package / Case="0805 (2012 Metric)", packaging=TapeAndReel, Part Number=SM0805UGC, Part Status=Active, partid=247, price=0.19, series=-, Size / Dimension="2.00mm L x 1.20mm W", Supplier 1=DigiKey, Viewing Angle=130°, Wavelength - Dominant=565nm, Wavelength - Peak=563nm
D21: library part 25-21/R6C-BR2S2B/2A, "LED RED CLEAR 1206 SMD", Current - Test=20mA, Device Package="1206 (3216 Metric)", Lens Color=Colorless, manufacturer="Everlight Electronics Co Ltd", Millicandela Rating=212.5mcd, Supplier Device Package=1206, Supplier Part Number 1=1080-25-21/R6C-BR2S2B/2ACT-ND, Voltage - Forward (Vf) (Typ)=2.05V, Color=Red, componentlink1description=Datasheet, componentlink1url=https://everlighteurope.com/index.php?controller=attachment&id_attachment=6134, componentlink2description="DigiKey Link", componentlink2url=https://www.digikey.com/en/products/detail/everlight-electronics-co-ltd/25-21-R6C-BR2S2B-2A/12177238, Height (Max)=1.20mm, lastupdated="6/3/2024 20:00:40", Lens Size="1.10mm Dia", Lens Style="Round with Domed Top", Lens Transparency=Clear, Lifecycle Status=Active, Minimum Order=1, Mounting Type="Surface Mount", Package / Case="1206 (3216 Metric)", packaging=TapeAndReel, Part Number=25-21/R6C-BR2S2B/2A, Part Status=Active, partid=1100, price=0.05, series=-, Size / Dimension="3.20mm L x 1.60mm W", Supplier 1=DigiKey, Viewing Angle=60°, Wavelength - Dominant=624nm, Wavelength - Peak=632nm
J18: "Connector", Manufacturer_Name="TE Connectivity", Mouser Part Number=571-1-776200-5, Datasheet Link=https://www.te.com/commerce/DocumentDelivery/DDEController?Action=showdoc&DocId=Customer+Drawing%7F776200%7FE%7Fpdf%7FEnglish%7FENG_CD_776200_E.pdf%7F1-776200-5, Height=34.25mm, Manufacturer_Part_Number=1-776200-5, Mouser Price/Stock=https://www.mouser.co.uk/ProductDetail/TE-Connectivity-AMP/1-776200-5?qs=YqNA2qefETBJbWsdhRcFeA%3D%3D
J28: "Connector", Manufacturer_Name=SAMTEC, Mouser Part Number=200-FTSH10501LDVA, Arrow Part Number=FTSH-105-01-L-DV-A, Arrow Price/Stock=https://www.arrow.com/en/products/ftsh-105-01-l-dv-a/samtec, Datasheet Link=http://suddendocs.samtec.com/prints/ftsh-1xx-xx-xxx-dv-xxx-xxx-mkt.pdf, Manufacturer_Part_Number=FTSH-105-01-L-DV-A, Mouser Price/Stock=https://www.mouser.co.uk/ProductDetail/Samtec/FTSH-105-01-L-DV-A?qs=vqM95g%252BRBeykLJELFbssPw%3D%3D
J38: "Connector", Manufacturer_Name="TE Connectivity", Mouser Part Number=571-875272, Arrow Part Number=87527-2, Arrow Price/Stock=https://www.arrow.com/en/products/87527-2/te-connectivity?region=nac, Datasheet Link=https://www.te.com/commerce/DocumentDelivery/DDEController?Action=showdoc&DocId=Customer+Drawing%7F87527%7FH%7Fpdf%7FEnglish%7FENG_CD_87527_H.pdf%7F87527-2, Height=10.439mm, Manufacturer_Part_Number=87527-2, Mouser Price/Stock=https://www.mouser.co.uk/ProductDetail/TE-Connectivity/87527-2?qs=ZDXmSm13593hsB4j%252B6gMfg%3D%3D
L11 L21: library part SRR1280-331K, "FIXED IND 330UH 1.1A 600MOHM SMD", Current - Saturation=1.4A, Current Rating (Amps)="1.1 A", DC Resistance (DCR)="600mOhm Max", Device Package=Nonstandard, Frequency - Self Resonant=2.9MHz, Inductance Frequency - Test="100 kHz", manufacturer="Bourns Inc.", Operating Temperature="-40°C ~ 125°C", Q @ Freq="18 @ 796kHz", Supplier Part Number 1=SRR1280-331KLCT-ND, Tolerance=±10%, componentlink1description=Datasheet, componentlink1url=https://www.bourns.com/docs/Product-Datasheets/SRR1280.pdf, componentlink2description="DigiKey Link", componentlink2url=https://www.digikey.com/en/products/detail/bourns-inc/SRR1280-331K/1970010, Height - Seated (Max)="0.315\" (8.00mm)", Inductance="330 µH", lastupdated="6/3/2024 20:02:37", Lifecycle Status=Active, Material - Core=Ferrite, Minimum Order=1, Mounting Type="Surface Mount", Package / Case=Nonstandard, packaging=TapeAndReel, Part Number=SRR1280-331K, Part Status=Active, partid=35, price=0.51, series=SRR1280, Shielding=Shielded, Size / Dimension="0.492\" L x 0.492\" W (12.50mm x 12.50mm)", Supplier 1=DigiKey, Type="Drum Core, Wirewound"
LS15: "AUDIO MAGNETIC IND 4-7V SMD", Current - Supply=30mA, Frequency=2.7kHz, manufacturer="PUI Audio, Inc.", Operating Mode="Single Tone", Operating Temperature="-40°C ~ 85°C", Ratings=Washable, Supplier Part Number 1=668-1537-1-ND, Voltage - Rated=5V, Voltage Range="4 ~ 7V", componentlink1description=Datasheet, componentlink1url=http://www.puiaudio.com/pdf/SMI-1027-TW-5V-R.pdf, componentlink2description="DigiKey Link", componentlink2url=http://digikey.com/product-detail/en/pui-audio-inc/SMI-1027-TW-5V-R/668-1537-1-ND/6021768, Driver Circuitry="Indicator, Internally Driven", Height - Seated (Max)="0.209\" (5.30mm)", Input Type=DC, lastupdated="4/24/2020 00:38:54", Lifecycle Status=Active, Minimum Order=1, Mounting Type="Surface Mount", packaging=TapeAndReel, Part Number=SMI-1027-TW-5V-R, Part Status=Active, Port Location=Top, price=2.15, series=SMI, Size / Dimension="0.378\" L x 0.378\" W (9.60mm x 9.60mm)", Sound Pressure Level (SPL)="80dB @ 5V, 10cm", Supplier 1=DigiKey, Technology=Magnetic, Termination="Solder Pads"
Q12 Q22 Q32 Q42 Q52 Q62 Q72 Q82 Q92 Q102 Q112: "Phototransistor", Manufacturer_Name="Sharp Microelectronics", Mouser Part Number=852-PC817XNNIP1B, Arrow Part Number=PC817XNNIP1B, Arrow Price/Stock=https://www.arrow.com/en/products/pc817xnnip1b/sharp, Datasheet Link=https://www.mouser.com/datasheet/2/365/SHARP_PC817XNNIP1B-1360398.pdf, Height=4.2mm, Manufacturer_Part_Number=PC817XNNIP1B, Mouser Price/Stock=https://www.mouser.co.uk/ProductDetail/Sharp-Microelectronics/PC817XNNIP1B?qs=rrS6PyfT74dJvnx7366b6Q%3D%3D
Q15: "TRANS NPN 25V 0.2A SOT23-3", Current - Collector (Ic) (Max)=200mA, Current - Collector Cutoff (Max)="50nA (ICBO)", DC Current Gain (hFE) (Min) @ Ic, Vce="120 @ 2mA, 1V", Frequency - Transition=300MHz, manufacturer="ON Semiconductor", Operating Temperature="-55°C ~ 150°C (TJ)", Package / Case="TO-236-3, SC-59, SOT-23-3", Power - Max=225mW, Supplier Device Package="SOT-23-3 (TO-236)", Supplier Part Number 1=MMBT4124LT1GOSCT-ND, Voltage - Collector Emitter Breakdown (Max)=25V, componentlink1description=Datasheet, componentlink1url=http://www.onsemi.com/pub/Collateral/MMBT4124LT1-D.PDF, componentlink2description="DigiKey Link", componentlink2url=http://digikey.com/product-detail/en/on-semiconductor/MMBT4124LT1G/MMBT4124LT1GOSCT-ND/2705123, lastupdated="3/11/2024 08:12:30", Lifecycle Status=Active, Minimum Order=1, Mounting Type="Surface Mount", packaging=TapeAndReel, Part Number=MMBT4124LT1G, Part Status=Active, partid=139, price=0.03, series=-, Supplier 1=DigiKey, Transistor Type=NPN, Vce Saturation (Max) @ Ib, Ic="300mV @ 5mA, 50mA"
R11 R21: library part AC0805FR-7W470RL, "RES 470 OHM 1% 1/4W 0805", Device Package="0805 (2012 Metric)", manufacturer=Yageo, Operating Temperature="-55°C ~ 155°C", Power (Watts)="0.25W, 1/4W", Ratings=AEC-Q200, Supplier Device Package=0805, Supplier Part Number 1=13-AC0805FR-7W470RLCT-ND, Temperature Coefficient=±100ppm/°C, Tolerance=±1%, componentlink1description=Datasheet, componentlink1url=https://www.yageo.com/upload/media/product/productsearch/datasheet/rchip/PYu-AC_51_RoHS_L_9.pdf, componentlink2description="DigiKey Link", componentlink2url=https://www.digikey.com/en/products/detail/yageo/AC0805FR-7W470RL/16982114, Composition="Thick Film", Features="Automotive AEC-Q200, Moisture Resistant", Height - Seated (Max)="0.024\" (0.60mm)", lastupdated="2/8/2024 21:00:08", Lifecycle Status=Active, Minimum Order=1, Number of Terminations=2, Package / Case="0805 (2012 Metric)", packaging=TapeAndReel, Part Number=AC0805FR-7W470RL, Part Status=Active, partid=76423, price=0.01, Resistance="470 Ohms", series=AC, Size / Dimension="0.079\" L x 0.049\" W (2.00mm x 1.25mm)", Supplier 1=DigiKey
R12 R22 R42 R52 R62 R172 R182 R192 R202: library part CRCW080519K1FKEA, "RES SMD 19.1K OHM 1% 1/8W 0805", Device Package="0805 (2012 Metric)", manufacturer="Vishay Dale", Operating Temperature="-55°C ~ 155°C", Power (Watts)="0.125W, 1/8W", Ratings=AEC-Q200, Supplier Device Package=0805, Supplier Part Number 1=541-19.1KCCT-ND, Temperature Coefficient=±100ppm/°C, Tolerance=±1%, componentlink1description=Datasheet, componentlink1url=http://www.vishay.com/docs/20035/dcrcwe3.pdf, componentlink2description="DigiKey Link", componentlink2url=https://www.digikey.com/en/products/detail/vishay-dale/CRCW080519K1FKEA/1175781, Composition="Thick Film", Features="Automotive AEC-Q200", Height - Seated (Max)="0.020\" (0.50mm)", lastupdated="2/8/2024 21:02:03", Lifecycle Status=Active, Minimum Order=1, Number of Terminations=2, Package / Case="0805 (2012 Metric)", packaging=TapeAndReel, Part Number=CRCW080519K1FKEA, Part Status=Active, partid=35928, price=0.01, Resistance="19.1 kOhms", series=CRCW, Size / Dimension="0.079\" L x 0.049\" W (2.00mm x 1.25mm)", Supplier 1=DigiKey
R13: library part AC0805FR-7W10KL, "RES 10 KOHM 1% 1/4W 0805", Device Package="0805 (2012 Metric)", manufacturer=Yageo, Operating Temperature="-55°C ~ 155°C", Power (Watts)="0.25W, 1/4W", Ratings=AEC-Q200, Supplier Device Package=0805, Supplier Part Number 1=13-AC0805FR-7W10KLCT-ND, Temperature Coefficient=±100ppm/°C, Tolerance=±1%, componentlink1description=Datasheet, componentlink1url=https://www.yageo.com/upload/media/product/productsearch/datasheet/rchip/PYu-AC_51_RoHS_L_8.pdf, componentlink2description="DigiKey Link", componentlink2url=https://www.digikey.com/en/products/detail/yageo/AC0805FR-7W10KL/12699138, Composition="Thick Film", Features="Automotive AEC-Q200, Moisture Resistant", Height - Seated (Max)="0.024\" (0.60mm)", lastupdated="2/8/2024 21:00:23", Lifecycle Status=Active, Minimum Order=1, Number of Terminations=2, Package / Case="0805 (2012 Metric)", packaging=TapeAndReel, Part Number=AC0805FR-7W10KL, Part Status=Active, partid=68014, price=0.01, Resistance="10 kOhms", series=AC, Size / Dimension="0.079\" L x 0.049\" W (2.00mm x 1.25mm)", Supplier 1=DigiKey
R14: library part 3386P-1-103LF, "TRIMMER 10K OHM 0.5W PC PIN TOP", manufacturer="Bourns Inc.", Power (Watts)="0.5W, 1/2W", Resistive Material=Cermet, Supplier Part Number 1=3386P-103LF-ND, Temperature Coefficient=±100ppm/°C, Tolerance=±10%, Adjustment Type="Top Adjustment", componentlink1description=Datasheet, componentlink1url=https://www.bourns.com/docs/Product-Datasheets/3386.pdf, componentlink2description="DigiKey Link", componentlink2url=https://www.digikey.com/en/products/detail/bourns-inc/3386P-1-103LF/1088523, lastupdated="3/11/2024 08:14:33", Lifecycle Status=Active, Minimum Order=1, Mounting Type="Through Hole", Number of Turns=1, packaging=Tube, Part Number=3386P-1-103LF, Part Status=Active, partid=100, price=0.72, Resistance="10 kOhms", series="Trimpot® 3386 - Sealed", Size / Dimension="Square - 0.375\" x 0.375\" Face (9.53mm x 9.53mm)", Supplier 1=DigiKey, Termination Style="PC Pins"
R15 R35: library part AC0805JR-0710KL, "RES SMD 10K OHM 5% 1/8W 0805", Device Package="0805 (2012 Metric)", manufacturer=Yageo, Operating Temperature="-55°C ~ 155°C", Power (Watts)="0.125W, 1/8W", Ratings=AEC-Q200, Supplier Device Package=0805, Supplier Part Number 1=YAG3758CT-ND, Temperature Coefficient=±100ppm/°C, Tolerance=±5%, componentlink1description=Datasheet, componentlink1url=https://www.yageo.com/upload/media/product/productsearch/datasheet/rchip/PYu-AC_51_RoHS_L_7.pdf, componentlink2description="DigiKey Link", componentlink2url=https://www.digikey.com/en/products/detail/yageo/AC0805JR-0710KL/5897043, Composition="Thick Film", Features="Automotive AEC-Q200, Moisture Resistant", Height - Seated (Max)="0.024\" (0.60mm)", lastupdated="2/8/2024 21:01:11", Lifecycle Status=Active, Minimum Order=1, Number of Terminations=2, Package / Case="0805 (2012 Metric)", packaging=TapeAndReel, Part Number=AC0805JR-0710KL, Part Status=Active, partid=47032, price=0.01, Resistance="10 kOhms", series=AC, Size / Dimension="0.079\" L x 0.049\" W (2.00mm x 1.25mm)", Supplier 1=DigiKey
R16 R26 R36: library part AC0805JR-07470RL, "RES SMD 470 OHM 5% 1/8W 0805", Device Package="0805 (2012 Metric)", manufacturer=Yageo, Operating Temperature="-55°C ~ 155°C", Power (Watts)="0.125W, 1/8W", Ratings=AEC-Q200, Supplier Device Package=0805, Supplier Part Number 1=YAG3791CT-ND, Temperature Coefficient=±100ppm/°C, Tolerance=±5%, componentlink1description=Datasheet, componentlink1url=https://www.yageo.com/upload/media/product/productsearch/datasheet/rchip/PYu-AC_51_RoHS_L_7.pdf, componentlink2description="DigiKey Link", componentlink2url=https://www.digikey.com/en/products/detail/yageo/AC0805JR-07470RL/5897150, Composition="Thick Film", Features="Automotive AEC-Q200, Moisture Resistant", Height - Seated (Max)="0.024\" (0.60mm)", lastupdated="2/8/2024 21:01:17", Lifecycle Status=Active, Minimum Order=1, Number of Terminations=2, Package / Case="0805 (2012 Metric)", packaging=TapeAndReel, Part Number=AC0805JR-07470RL, Part Status=Active, partid=46466, price=0.01, Resistance="470 Ohms", series=AC, Size / Dimension="0.079\" L x 0.049\" W (2.00mm x 1.25mm)", Supplier 1=DigiKey
R23: library part RC0805FR-07120RL, "RES 120 OHM 1% 1/8W 0805", Device Package="0805 (2012 Metric)", manufacturer=Yageo, Operating Temperature="-55°C ~ 155°C", Power (Watts)="0.125W, 1/8W", Supplier Device Package=0805, Supplier Part Number 1=311-120CRCT-ND, Temperature Coefficient=±100ppm/°C, Tolerance=±1%, componentlink1description=Datasheet, componentlink1url=https://www.yageo.com/upload/media/product/productsearch/datasheet/rchip/PYu-RC_Group_51_RoHS_L_10.pdf, componentlink2description="DigiKey Link", componentlink2url=https://www.digikey.com/en/products/detail/yageo/RC0805FR-07120RL/727575, Composition="Thick Film", Features="Moisture Resistant", Height - Seated (Max)="0.024\" (0.60mm)", lastupdated="2/8/2024 21:01:49", Lifecycle Status=Active, Minimum Order=1, Number of Terminations=2, Package / Case="0805 (2012 Metric)", packaging=TapeAndReel, Part Number=RC0805FR-07120RL, Part Status=Active, partid=39440, price=0.01, Resistance="120 Ohms", series=RC_L, Size / Dimension="0.079\" L x 0.049\" W (2.00mm x 1.25mm)", Supplier 1=DigiKey
R25: library part 3430A2F510RTDF, "3430 A2 1% 510R 100PPM 1K RL", Device Package="0805 (2012 Metric)", manufacturer="TE Connectivity Passive Product", Operating Temperature="-55°C ~ 155°C", Power (Watts)=1W, Ratings=AEC-Q200, Supplier Device Package=0508, Supplier Part Number 1=1712-3430A2F510RTDFCT-ND, Temperature Coefficient=±100ppm/°C, Tolerance=±1%, componentlink2description="DigiKey Link", componentlink2url=https://www.digikey.com/en/products/detail/te-connectivity-passive-product/3430A2F510RTDF/17763734, Composition="Thick Film", Features="Automotive AEC-Q200", Height - Seated (Max)="0.026\" (0.65mm)", lastupdated="2/8/2024 21:00:03", Lifecycle Status=Active, Minimum Order=1, Number of Terminations=2, Package / Case="0805 (2012 Metric)", packaging=TapeAndReel, Part Number=3430A2F510RTDF, Part Status=Active, partid=77774, price=0.02, Resistance="510 Ohms", series=3430, Size / Dimension="0.049\" L x 0.079\" W (1.25mm x 2.00mm)", Supplier 1=DigiKey
R32 R212: library part CRCW080548K7FKEA, "RES SMD 48.7K OHM 1% 1/8W 0805", Device Package="0805 (2012 Metric)", manufacturer="Vishay Dale", Operating Temperature="-55°C ~ 155°C", Power (Watts)="0.125W, 1/8W", Ratings=AEC-Q200, Supplier Device Package=0805, Supplier Part Number 1=541-48.7KCCT-ND, Temperature Coefficient=±100ppm/°C, Tolerance=±1%, componentlink1description=Datasheet, componentlink1url=http://www.vishay.com/docs/20035/dcrcwe3.pdf, componentlink2description="DigiKey Link", componentlink2url=https://www.digikey.com/en/products/detail/vishay-dale/CRCW080548K7FKEA/1175829, Composition="Thick Film", Features="Automotive AEC-Q200", Height - Seated (Max)="0.020\" (0.50mm)", lastupdated="2/8/2024 21:02:03", Lifecycle Status=Active, Minimum Order=1, Number of Terminations=2, Package / Case="0805 (2012 Metric)", packaging=TapeAndReel, Part Number=CRCW080548K7FKEA, Part Status=Active, partid=35941, price=0.01, Resistance="48.7 kOhms", series=CRCW, Size / Dimension="0.079\" L x 0.049\" W (2.00mm x 1.25mm)", Supplier 1=DigiKey